# Altium PCB sram_cpu.PcbDoc
Units mil, origin at the board's own origin, x right, y up, seen from the top; angles counter-clockwise.
Board outline 6000 x 4000 mil, 2 copper layers (Top Layer, Bottom Layer); 18 components, 74 nets, 328 pads, 0 vias.
Unrouted connection lines stored in the file: 185.
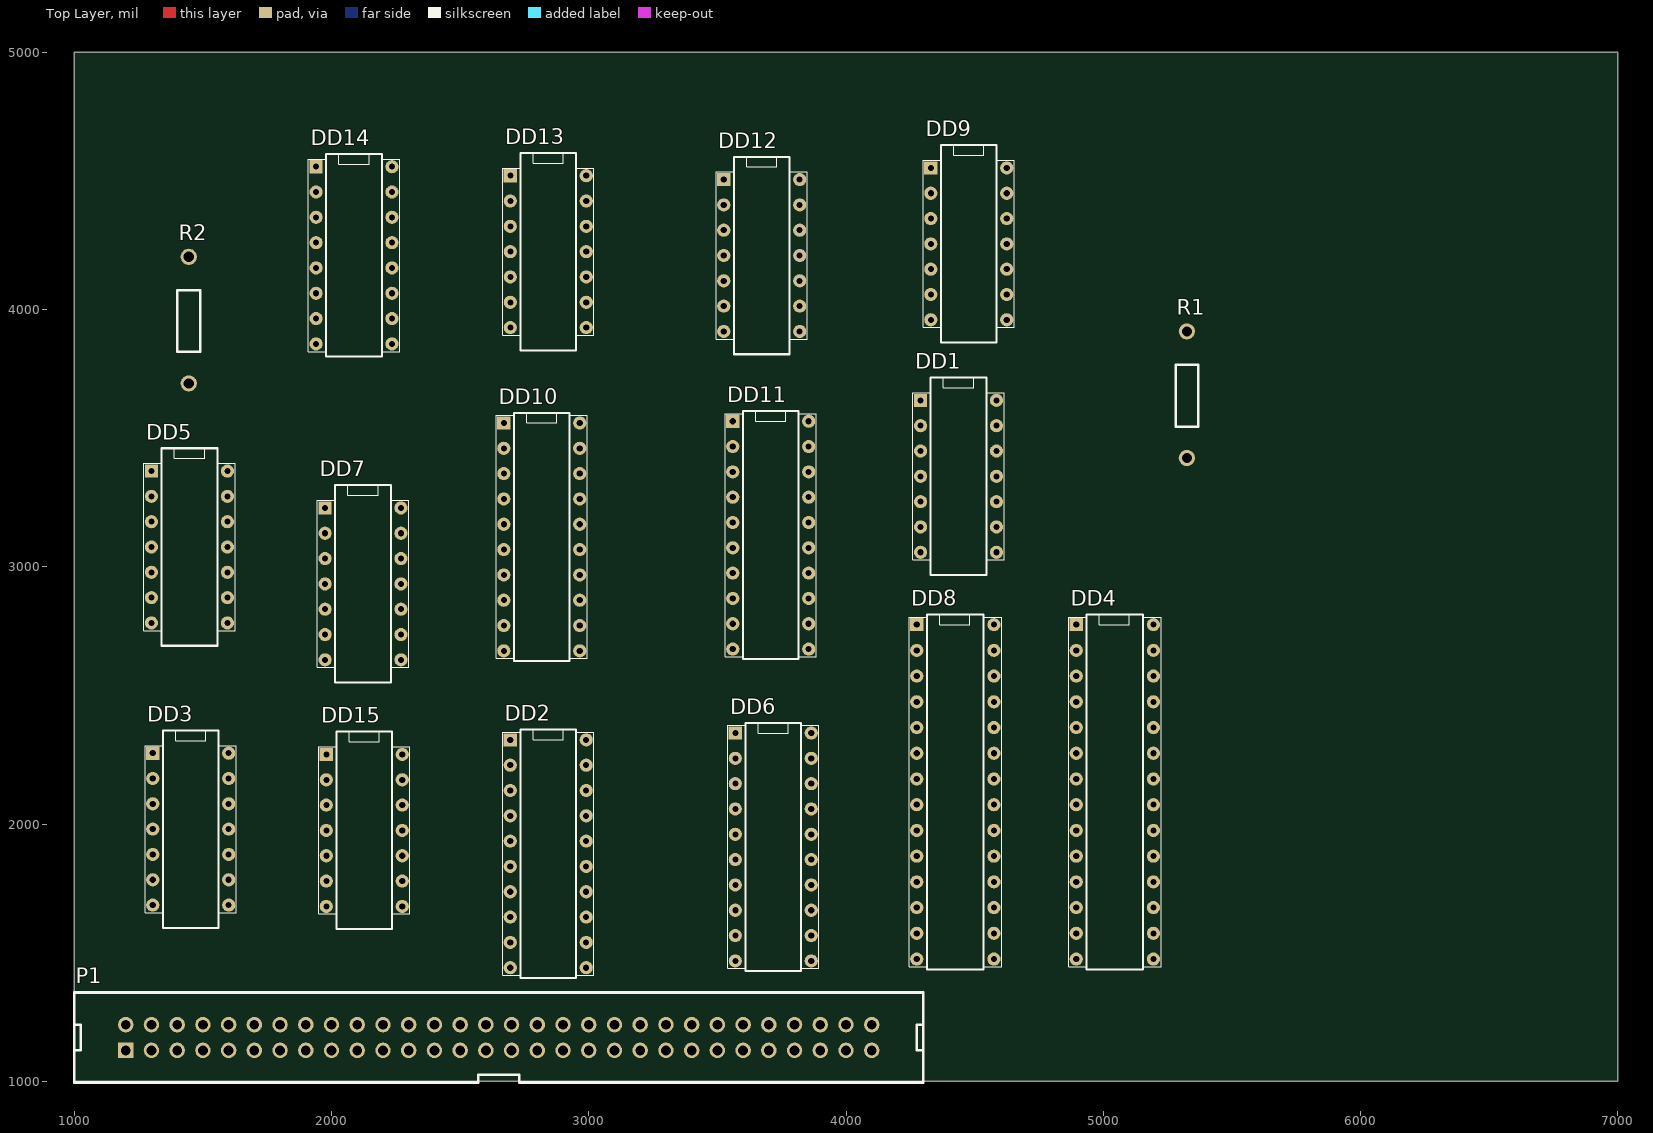
[diagram p0: Top Layer view]
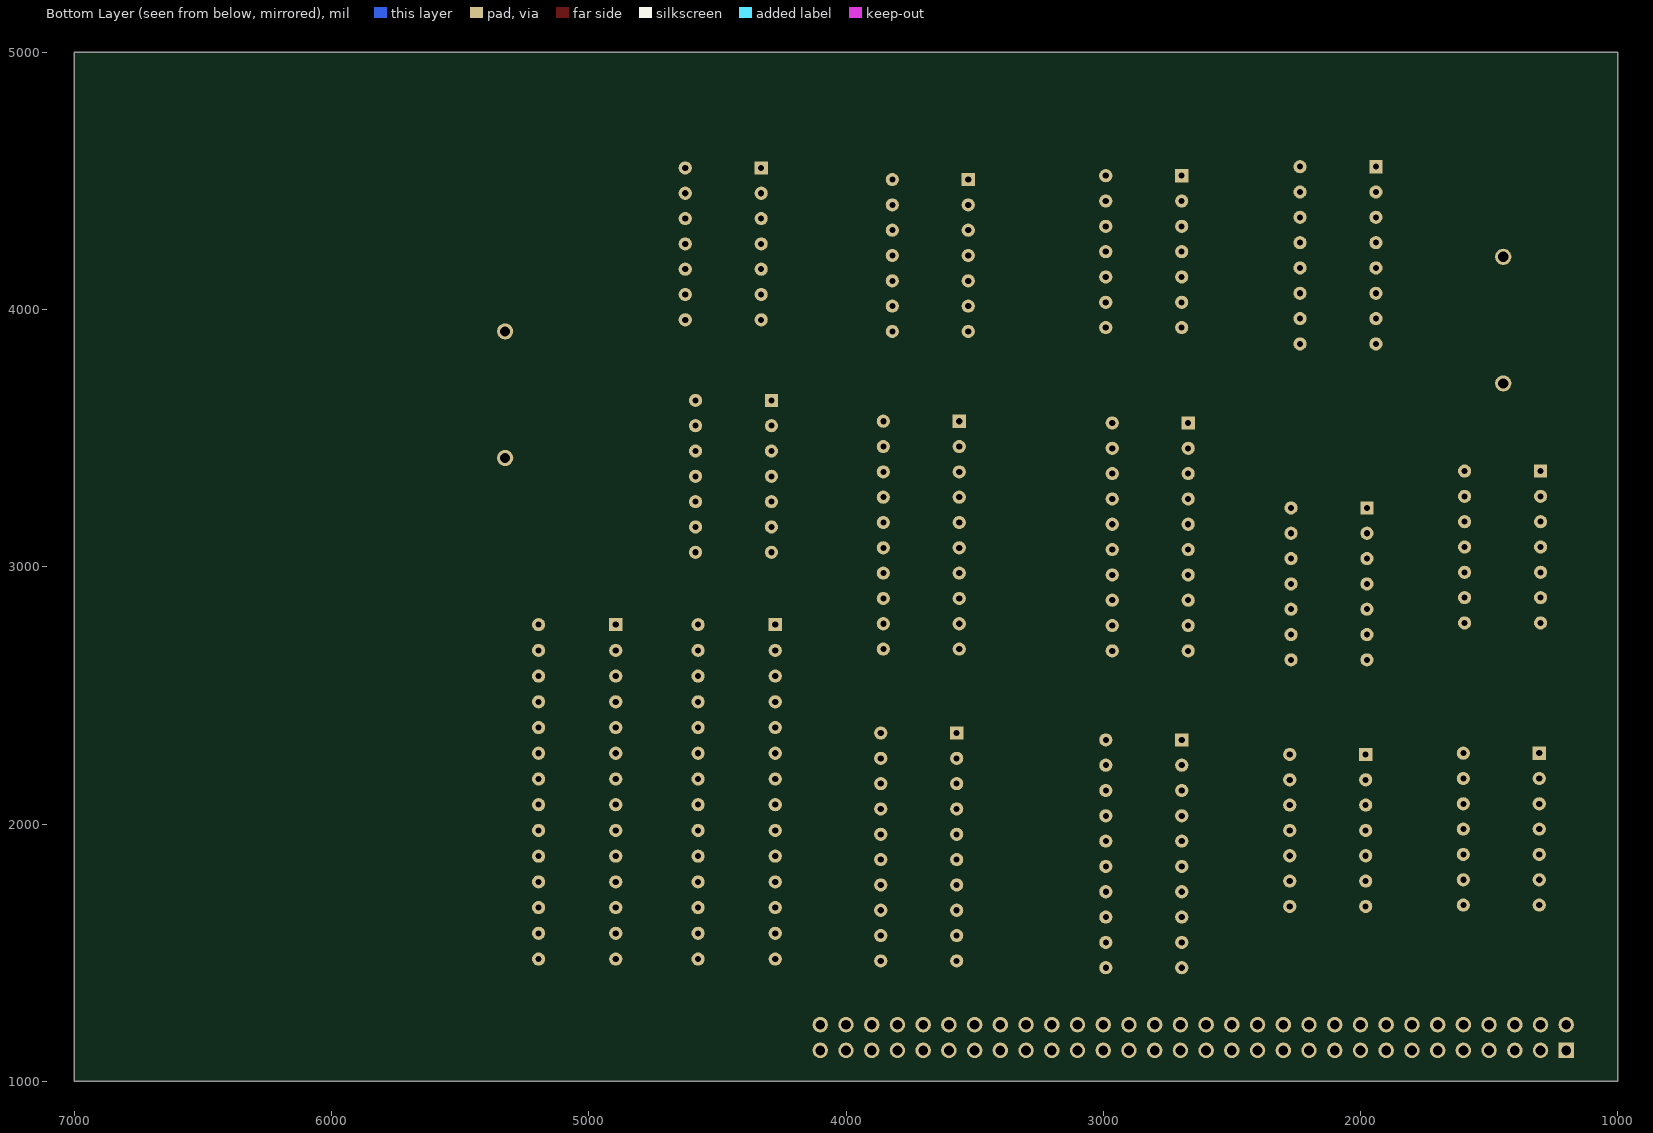
[diagram p1: Bottom Layer view, seen from below]

## Layer stack, top to bottom
Top Solder: solder mask 0.4, Solder Resist, Dk 3.5
Top Layer: signal copper 1.4
Dielectric 1: dielectric 12.6, FR-4, Dk 4.8
Bottom Layer: signal copper 1.4
Bottom Solder: solder mask 0.4, Solder Resist, Dk 3.5

## Board outline
1000,1000 7000,1000 7000,5000 1000,5000

## Design rules (kind name [scope] priority, off if disabled: settings)
Clearance [All] p1: gap=10 ignorepadtopadclearanceinfootprint=FALSE except(0: Arc-Hole Track-Hole SMDPad-Hole THPad-Hole Via-Hole Fill-Hole Poly-Hole Region-Hole Text-Hole)
PolygonConnect [All] p1: connectstyle=Relief reliefconductorwidth=10 reliefentries=4 polygonreliefangle="90 Angle" airgapwidth=10
RoutingVias [All] p1: holewidth=28 width=50 viastyle="Through Hole" minholewidth=28 minwidth=50 maxholewidth=28 maxwidth=50
SolderMaskExpansion [All] p1: expansion=4
Width [All] p1: maxlimit=10 minlimit=10 preferedwidth=10
30 further rules are at their usual default settings.

## Components (designator, comment, footprint, x,y, rotation, side; value= is the part's Value field where it differs from the comment)
DD1 "КР1533ЛП5" 2101.14-1 4289.72,3646.85 r90 top
DD2 "КР1533ИР23" 2140.20-4 2694.72,2327.13 r90 top
DD3 "КР1533ЛН1" 2101.14-1 1305,2275.28 r90 top
DD4 "71256SA12TP" DIP28 4895,2775 r90 top
DD5 "КР1533ЛА13" 2101.14-1 1300,3372.13 r90 top
DD6 "КР1533ИР23" 2140.20-4 3569.72,2353.7 r90 top
DD7 "КР1533ТМ2" 2101.14-1 1974.72,3228.7 r90 top
DD8 "71256SA12TP" DIP28 4275,2775 r90 top
DD9 "КР1533ЛЕ4" 2101.14-1 4329.72,4550.55 r90 top
DD10 "КР1533ИР35" 2140.20-4 2669.72,3558.98 r90 top
DD11 "КР1533ИР23" 2140.20-4 3559.72,3565.83 r90 top
DD12 "КР1533ЛЕ4" 2101.14-1 3524.72,4505.28 r90 top
DD13 "КР1533ЛА4" 2101.14-1 2695,4520.28 r90 top
DD14 "КР1533КП11" 2103.16-1 1939.72,4555.28 r90 top
DD15 "КР1533ЛА3" 2101.14-1 1979.72,2270.28 r90 top
P1 "IDC2X30M" IDC60M 1200,1120 r180 top
R1 "R0125A" R0125A 5325,3915 r270 top value=2K
R2 "R0125A" R0125A 1445,4205 r270 top value=2K

## Footprints (in the part's own frame and the unit in brackets; to place one, negate y for a bottom-side part, rotate by r counter-clockwise, add the part's x,y. Pads: shape width x height; smd on the part's side, far side on the other; paste and mask are expansions set on the pad)
2101.14-1 [mm]
  rect 1.3x1.3 hole 0.6: 1(0,0)
  round 1.3 hole 0.6: 2(-2.5,0) 3(-5,0) 4(-7.5,0) 5(-10,0) 6(-12.5,0) 7(-15,0) 8(-15,-7.5) 9(-12.5,-7.5) 10(-10,-7.5) 11(-7.5,-7.5) 12(-5,-7.5) 13(-2.5,-7.5) 14(0,-7.5)
  silkscreen extent -17.25,-8.25 2.25,0.75
2103.16-1 [mm]
  rect 1.3x1.3 hole 0.6: 1(0,0)
  round 1.3 hole 0.6: 2(-2.5,0) 3(-5,0) 4(-7.5,0) 5(-10,0) 6(-12.5,0) 7(-15,0) 8(-17.5,0) 9(-17.5,-7.5) 10(-15,-7.5) 11(-12.5,-7.5) 12(-10,-7.5) 13(-7.5,-7.5) 14(-5,-7.5) 15(-2.5,-7.5) 16(0,-7.5)
  silkscreen extent -18.75,-8.25 1.25,0.75
2140.20-4 [mm]
  rect 1.3x1.3 hole 0.6: 1(0,0)
  round 1.3 hole 0.6: 2(-2.5,0) 3(-5,0) 4(-7.5,0) 5(-10,0) 6(-12.5,0) 7(-15,0) 8(-17.5,0) 9(-20,0) 10(-22.5,0) 11(-22.5,-7.5) 12(-20,-7.5) 13(-17.5,-7.5) 14(-15,-7.5) 15(-12.5,-7.5) 16(-10,-7.5) 17(-7.5,-7.5) 18(-5,-7.5) 19(-2.5,-7.5) 20(0,-7.5)
  silkscreen extent -23.5,-8.25 1,0.75
DIP28 [mm]
  rect 1.3x1.3 hole 0.6: 1(0,0)
  round 1.3 hole 0.6: 2(-2.54,0) 3(-5.08,0) 4(-7.62,0) 5(-10.16,0) 6(-12.7,0) 7(-15.24,0) 8(-17.78,0) 9(-20.32,0) 10(-22.86,0) 11(-25.4,0) 12(-27.94,0) 13(-30.48,0) 14(-33.02,0) 15(-33.02,-7.62) 16(-30.48,-7.62) 17(-27.94,-7.62) 18(-25.4,-7.62) 19(-22.86,-7.62) 20(-20.32,-7.62) 21(-17.78,-7.62) 22(-15.24,-7.62) 23(-12.7,-7.62) 24(-10.16,-7.62) 25(-7.62,-7.62) 26(-5.08,-7.62) 27(-2.54,-7.62) 28(0,-7.62)
  silkscreen extent -34.04,-8.38 1,0.75
IDC60M [mil]
  rect 60x60 hole 38: 1(0,0)
  round 60 hole 38: 2(0,-100) 3(-100,0) 4(-100,-100) 5(-200,0) 6(-200,-100) 7(-300,0) 8(-300,-100) 9(-400,0) 10(-400,-100) 11(-500,0) 12(-500,-100) 13(-600,0) 14(-600,-100) 15(-700,0) 16(-700,-100) 17(-800,0) 18(-800,-100) 19(-900,0) 20(-900,-100) 21(-1000,0) 22(-1000,-100) 23(-1100,0) 24(-1100,-100) 25(-1200,0) 26(-1200,-100) 27(-1300,0) 28(-1300,-100) 29(-1400,0) 30(-1400,-100) 31(-1500,0) 32(-1500,-100) 33(-1600,0) 34(-1600,-100) 35(-1700,0) 36(-1700,-100) 37(-1800,0) 38(-1800,-100) 39(-1900,0) 40(-1900,-100) 41(-2000,0) 42(-2000,-100) 43(-2100,0) 44(-2100,-100) 45(-2200,0) 46(-2200,-100) 47(-2300,0) 48(-2300,-100) 49(-2400,0) 50(-2400,-100) 51(-2500,0) 52(-2500,-100) 53(-2600,0) 54(-2600,-100) 55(-2700,0) 56(-2700,-100) 57(-2800,0) 58(-2800,-100) 59(-2900,0) 60(-2900,-100)
  silkscreen extent -3100,-225 200,125
R0125A [mm]
  round 1.6 hole 1: 1(0,0) 2(12.5,0)
  silkscreen extent 3.3,-1.12 9.4,1.12

## Part data
DD1: library part КР1533ЛП5(74ALS86)
DD2 DD6 DD11: library part КР1533ИР23(74ALS374)
DD3: library part КР1533ЛН1(74ALS04)
DD4 DD8: library part 71256SA
DD5: library part КР1533ЛА13(74ALS38)
DD9 DD12: library part КР1533ЛЕ4(74ALS27)
DD10: library part КР1533ИР35(74ALS273)
DD13: library part КР1533ЛА4(74ALS10)
DD14: library part КР1533КП11(74ALS257)
DD15: library part КР1533ЛА3(74ALS00)
P1: library part IDC2X30M_A, "IDC Header"
R1 R2: PDIF_TY=11107

## Nets (pads, with @x,y where several pads share a name; then routed paths per layer and width w, separated by ;. In a path a pad name is that pad's centre, name@x,y a point inside that pad or via, vN(x,y) a via of type N, cw(c..) or ccw(c..) an arc to the next point about the centre after c; other vN are vias at no path point)
A12/A\1\2\: DD1.6 DD14.1
A\0\: DD2.2 DD3.3
A\1\: DD2.5 DD4.10 DD8.10 DD13.11
A\1\0\: DD4.24 DD6.6 DD8.24 DD9.13
A\1\1\: DD4.21 DD6.9 DD8.21 DD9.2
A\1\2\: DD1.5 DD6.12 DD9.1
A\1\2\'\: DD4.23 DD8.23 DD14.4
A\1\3\'\: DD4.2 DD8.2 DD14.7
A\1\4\'\: DD4.26 DD8.26 DD14.9
A\1\5\'\: DD4.1 DD8.1 DD14.12
A\2\: DD2.6 DD4.9 DD8.9 DD13.10
A\3\: DD2.9 DD4.8 DD8.8 DD13.9
A\4\: DD2.12 DD4.7 DD8.7 DD13.5
A\5\: DD2.15 DD4.6 DD8.6 DD13.4
A\6\: DD2.16 DD4.5 DD8.5 DD13.3
A\7\: DD2.19 DD4.4 DD8.4 DD13.13
A\8\: DD4.3 DD6.2 DD8.3 DD13.2
A\9\: DD4.25 DD6.5 DD8.25 DD13.1
A\D\0\: DD2.3 DD4.11 DD10.3 DD11.2 P1.27
A\D\1\: DD2.4 DD4.12 DD10.4 DD11.5 P1.29
A\D\1\0\: DD6.7 DD8.13 P1.47
A\D\1\1\: DD6.8 DD8.15 P1.49
A\D\1\2\: DD6.13 DD8.16 P1.51
A\D\1\3\: DD6.14 DD8.17 P1.53
A\D\1\4\: DD6.17 DD8.18 P1.55
A\D\1\5\: DD6.18 DD8.19 P1.57
A\D\2\: DD2.7 DD4.13 DD10.7 DD11.6 P1.31
A\D\3\: DD2.8 DD4.15 DD10.8 DD11.9 P1.33
A\D\4\: DD2.13 DD4.16 DD10.13 DD11.12 P1.35
A\D\5\: DD2.14 DD4.17 DD10.14 DD11.15 P1.37
A\D\6\: DD2.17 DD4.18 DD10.17 DD11.16 P1.39
A\D\7\: DD2.18 DD4.19 DD10.18 DD11.19 P1.41
A\D\8\: DD6.3 DD8.11 P1.43
A\D\9\: DD6.4 DD8.12 P1.45
B\S\7\: DD9.4 DD12.2 P1.19
C\S\_H: DD8.20 DD15.11
C\S\_L: DD4.20 DD15.8
D\I\N\: DD4.22 DD5.1 DD8.22 DD12.9 P1.7
D\O\U\T\: DD4.27 DD5.2 DD8.27 DD12.3 P1.3
GND: DD1.9 DD1.10 DD1.12 DD1.13 DD2.1 DD3.13 DD5.12 DD5.13 DD6.1 DD7.10 DD7.11 DD7.12 DD7.13 DD14.3 DD14.6 DD14.10 DD14.13 DD14.15 P1.2 P1.24 P1.26 P1.50 P1.60
I\N\I\T\: DD10.1 P1.25
NetDD1_3: DD1.3 DD5.5
NetDD3_4: DD3.4 DD15.1
NetDD3_6: DD3.6 DD15.2 DD15.5
NetDD3_8: DD3.8 DD12.4 DD12.5 DD12.10 DD12.11
NetDD3_10: DD3.10 DD11.1
NetDD3_11: DD3.11 DD11.11 DD12.8
NetDD5_3: DD5.3 DD5.4 R1.1
NetDD5_8: DD5.8 DD12.13 R2.1
NetDD5_9: DD5.9 DD9.5 DD9.12
NetDD5_10: DD5.10 DD9.8
NetDD7_6: DD7.6 DD9.3 DD12.1
NetDD9_9: DD9.9 DD13.12
NetDD9_10: DD9.10 DD13.6
NetDD9_11: DD9.11 DD13.8
NetDD10_11: DD10.11 DD12.6
NetDD15_3: DD15.3 DD15.4 DD15.9
NetDD15_6: DD15.6 DD15.12
R\P\L\Y\: DD5.6 P1.5
RAM_CS: DD1.2 DD9.6 DD15.10 DD15.13
REG_CS: DD1.1 DD3.9 DD12.12
S\E\L\: DD7.2 P1.10
S\Y\N\C\: DD3.1 P1.9
SYNC: DD2.11 DD3.2 DD6.11 DD7.1 DD7.3
VCC: DD7.4 P1.1 P1.59 R1.2 R2.2
W\T\B\T\: DD3.5 P1.11
X0: DD10.2 DD11.3 DD14.2
X1: DD10.5 DD11.4 DD14.5
X2: DD10.6 DD11.7 DD14.11
X3: DD10.9 DD11.8 DD14.14
X4: DD10.12 DD11.13
X5: DD10.15 DD11.14
X6: DD10.16 DD11.17
X7: DD1.4 DD10.19 DD11.18
pads on no net: DD1.7 DD1.8 DD1.11 DD1.14 DD2.10 DD2.20 DD3.7 DD3.12 DD3.14 DD4.14 DD4.28 DD5.7 DD5.11 DD5.14 DD6.10 DD6.15 DD6.16 DD6.19 DD6.20 DD7.5 DD7.7 DD7.8 DD7.9 DD7.14 DD8.14 DD8.28 DD9.7 DD9.14 DD10.10 DD10.20 DD11.10 DD11.20 DD12.7 DD12.14 DD13.7 DD13.14 DD14.8 DD14.16 DD15.7 DD15.14 P1.4 P1.6 P1.8 P1.12 P1.13 P1.14 P1.15 P1.16 P1.17 P1.18 P1.20 P1.21 P1.22 P1.23 P1.28 P1.30 P1.32 P1.34 P1.36 P1.38 P1.40 P1.42 P1.44 P1.46 P1.48 P1.52 P1.54 P1.56 P1.58